# Altium PCB SNES TST Adapter.PcbDoc
Units mm, origin at the board's own origin, x right, y up, seen from the top; angles counter-clockwise.
Board outline 18.8 x 25 mm, 4 copper layers (Top Layer, Signal Layer 1, Signal Layer 2, Bottom Layer), stack 0.778 mm thick; 2 components, 68 nets, 280 pads, 86 vias.
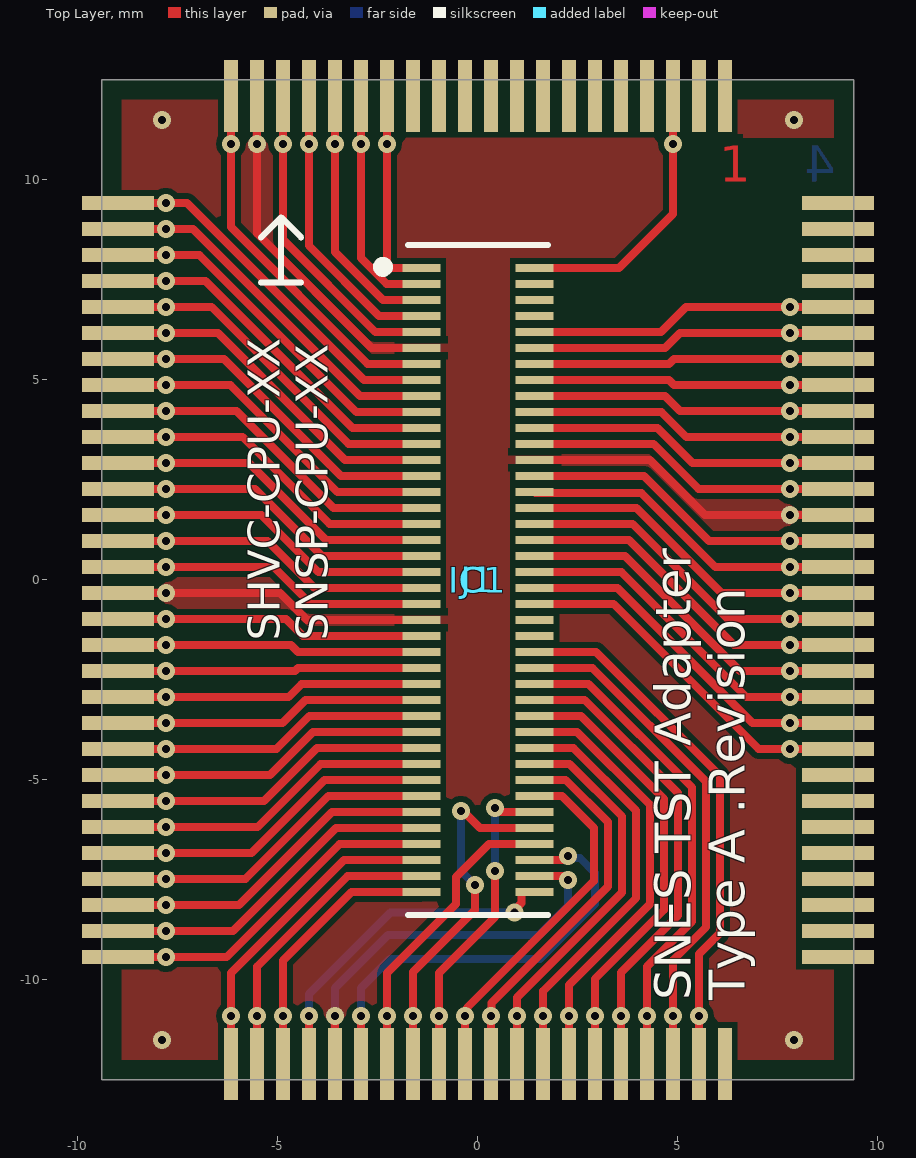
[diagram p0: Top Layer view]
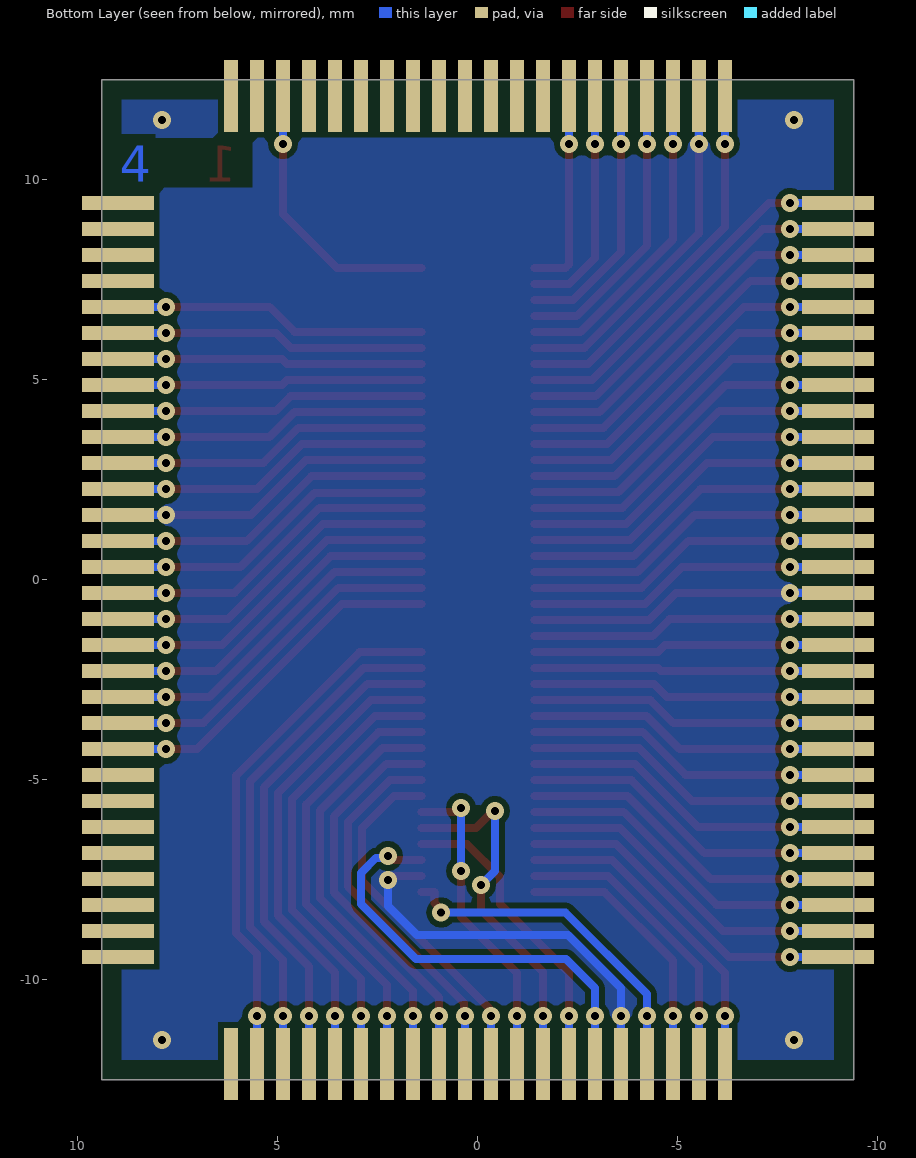
[diagram p1: Bottom Layer view, seen from below]
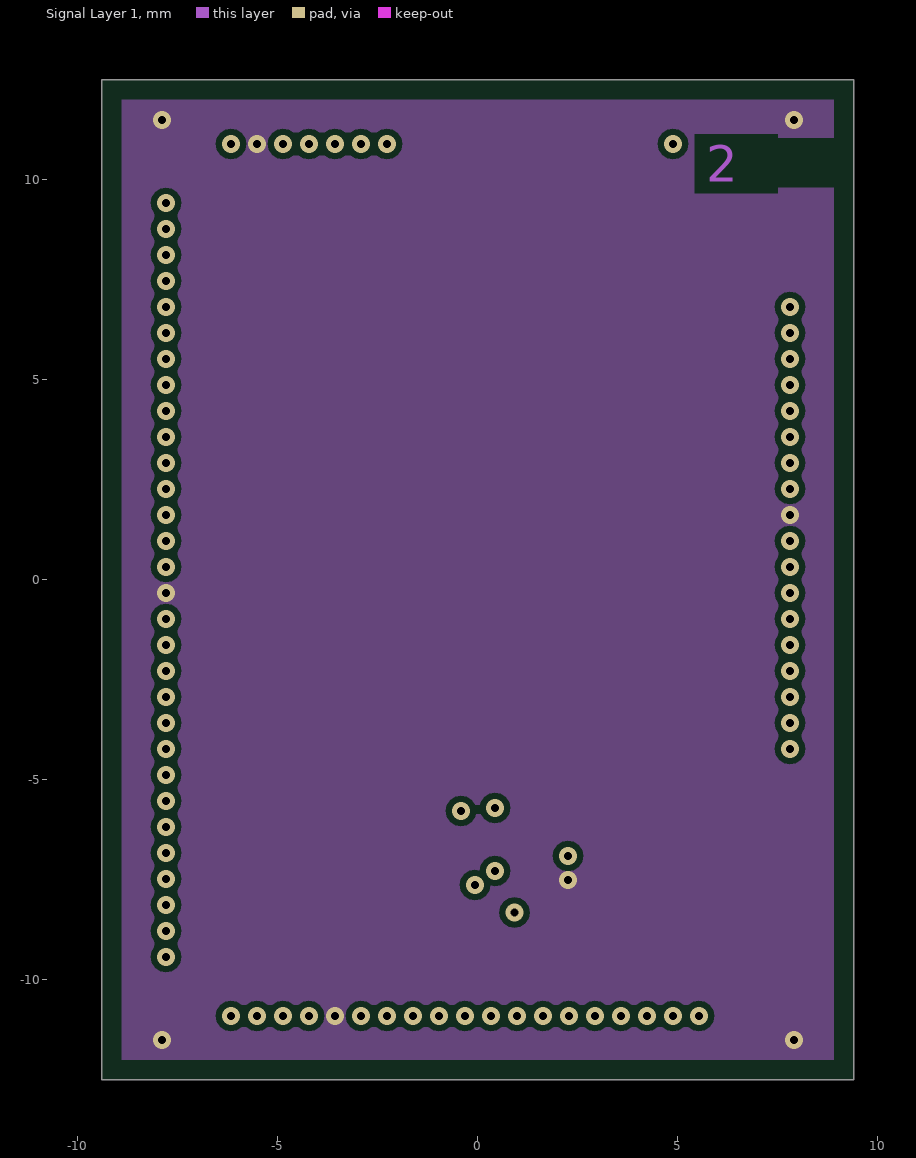
[diagram p2: Signal Layer 1]
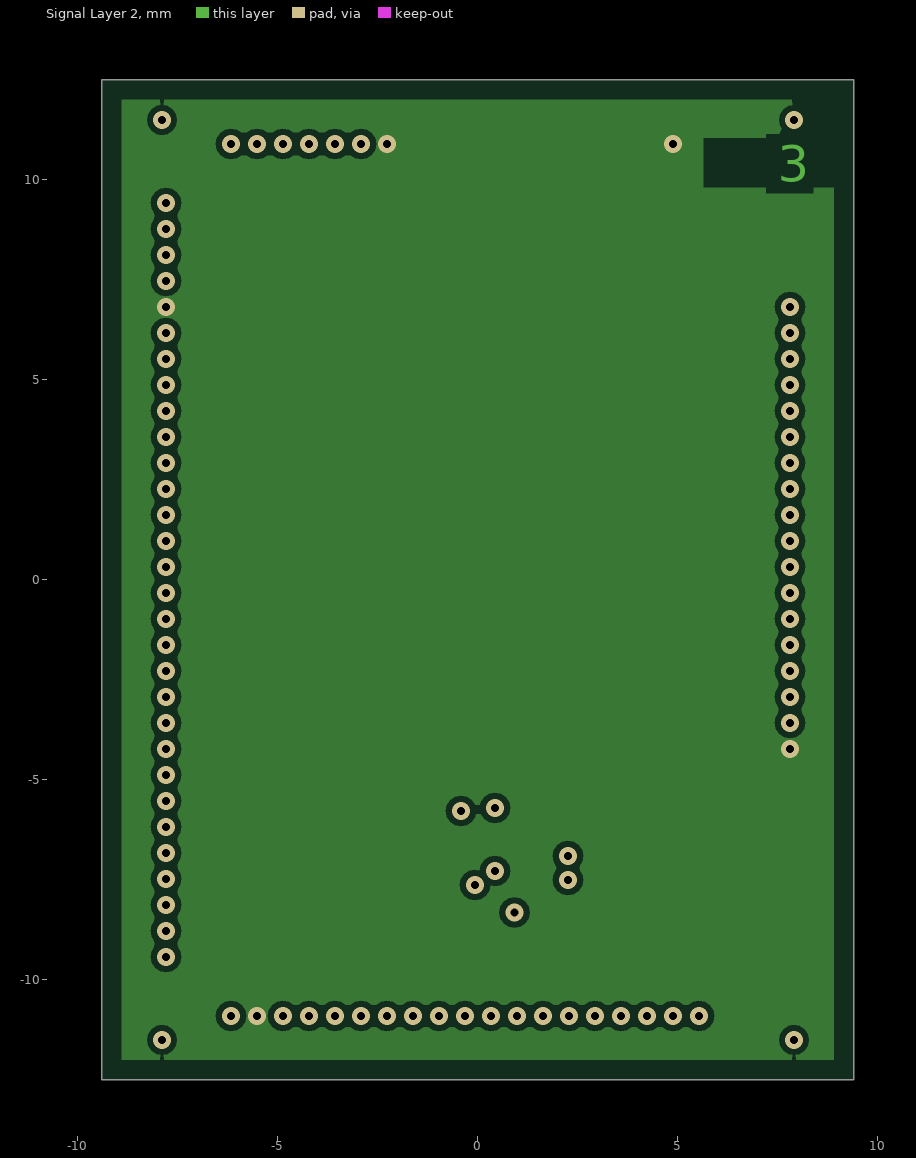
[diagram p3: Signal Layer 2]

## Layer stack, top to bottom
Top Solder: solder mask 0.0102, Solder Resist, Dk 3.5
Top Layer: signal copper 0.0356
Dielectric 1: core 0.254, FR-4, Dk 4.2
Signal Layer 1: signal copper 0.036
Dielectric 3: prepreg 0.127, Dk 4.2
Signal Layer 2: signal copper 0.036
Dielectric 2: core 0.254, Dk 4.2
Bottom Layer: signal copper 0.0356
Bottom Solder: solder mask 0.0102, Solder Resist, Dk 3.5

## Board outline
-9.4,-12.5 9.4,-12.5 9.4,12.5 -9.4,12.5

## Design rules (kind name [scope] priority, off if disabled: settings)
Clearance Clearance_1 [OnLayer('Keep-Out Layer')] p1: gap=0.15 ignorepadtopadclearanceinfootprint=FALSE except(0: Arc-Hole Track-Hole SMDPad-Hole THPad-Hole Via-Hole Fill-Hole Poly-Hole Region-Hole Text-Hole)
Clearance [All] p2: gap=0.15 ignorepadtopadclearanceinfootprint=FALSE except(0: Arc-Hole Track-Hole SMDPad-Hole THPad-Hole Via-Hole Fill-Hole Poly-Hole Region-Hole Text-Hole)
MinimumSolderMaskSliver [All] p1: minsoldermaskwidth=0.099
PolygonConnect PolygonConnect_Via [isVia] p1: connectstyle=Direct reliefconductorwidth=0.254 reliefentries=4 polygonreliefangle="90 Angle" airgapwidth=0.254
PolygonConnect [All] p2: connectstyle=Relief reliefconductorwidth=0.2 reliefentries=4 polygonreliefangle="90 Angle" airgapwidth=0.2
RoutingVias [All] p1: holewidth=0.711 width=1.27 viastyle="Through Hole" minholewidth=0.2 minwidth=0.35 maxholewidth=0.711 maxwidth=1.27
SilkToSilkClearance [All] p1: silktosilkclearance=0.1
SilkToSolderMaskClearance [IsPad] p1: minsilkscreentomaskgap=0.1 clearancetoexposedcopper=TRUE
SolderMaskExpansion [All] p1: expansion=0.05 istentingtop=FALSE
UnRoutedNet [Not InNet('5V_S')] p1:
Width [All] p1: maxlimit=0.75 minlimit=0.2 preferedwidth=0.254
26 further rules are at their usual default settings.

## Components (designator, comment, footprint, x,y, rotation, side; value= is the part's Value field where it differs from the comment)
IC1 "PPU2100Pin" PPU100Pin_Double 0,0 r0 top
J1 "Conn 80P" DF40C-80DS 0,0 r270 top

## Footprints (in the part's own frame and the unit in brackets; to place one, negate y for a bottom-side part, rotate by r counter-clockwise, add the part's x,y. Pads: shape width x height; smd on the part's side, far side on the other; paste and mask are expansions set on the pad)
DF40C-80DS [mm]
  rect 0.2x0.95 smd: 1(-7.8,-1.415) 2(-7.8,1.415) 3(-7.4,-1.415) 4(-7.4,1.415) 5(-7,-1.415) 6(-7,1.415) 7(-6.6,-1.415) 8(-6.6,1.415) 9(-6.2,-1.415) 10(-6.2,1.415) 11(-5.8,-1.415) 12(-5.8,1.415) 13(-5.4,-1.415) 14(-5.4,1.415) 15(-5,-1.415) 16(-5,1.415) 17(-4.6,-1.415) 18(-4.6,1.415) 19(-4.2,-1.415) 20(-4.2,1.415) 21(-3.8,-1.415) 22(-3.8,1.415) 23(-3.4,-1.415) 24(-3.4,1.415) 25(-3,-1.415) 26(-3,1.415) 27(-2.6,-1.415) 28(-2.6,1.415) 29(-2.2,-1.415) 30(-2.2,1.415) 31(-1.8,-1.415) 32(-1.8,1.415) 33(-1.4,-1.415) 34(-1.4,1.415) 35(-1,-1.415) 36(-1,1.415) 37(-0.6,-1.415) 38(-0.6,1.415) 39(-0.2,-1.415) 40(-0.2,1.415) 41(0.2,-1.415) 42(0.2,1.415) 43(0.6,-1.415) 44(0.6,1.415) 45(1,-1.415) 46(1,1.415) 47(1.4,-1.415) 48(1.4,1.415) 49(1.8,-1.415) 50(1.8,1.415) 51(2.2,-1.415) 52(2.2,1.415) 53(2.6,-1.415) 54(2.6,1.415) 55(3,-1.415) 56(3,1.415) 57(3.4,-1.415) 58(3.4,1.415) 59(3.8,-1.415) 60(3.8,1.415) 61(4.2,-1.415) 62(4.2,1.415) 63(4.6,-1.415) 64(4.6,1.415) 65(5,-1.415) 66(5,1.415) 67(5.4,-1.415) 68(5.4,1.415) 69(5.8,-1.415) 70(5.8,1.415) 71(6.2,-1.415) 72(6.2,1.415) 73(6.6,-1.415) 74(6.6,1.415) 75(7,-1.415) 76(7,1.415) 77(7.4,-1.415) 78(7.4,1.415) 79(7.8,-1.415) 80(7.8,1.415)
  silkscreen extent -8.37,-2.5 8.37,1.75, body extent -9.3,-1.69 9.3,1.69, height 1.4
PPU100Pin_Double [mm]
  rect 1.8x0.35 smd: 1(-9,9.425) 2(-9,8.775) 3(-9,8.125) 4(-9,7.475) 5(-9,6.825) 6(-9,6.175) 7(-9,5.525) 8(-9,4.875) 9(-9,4.225) 10(-9,3.575) 11(-9,2.925) 12(-9,2.275) 13(-9,1.625) 14(-9,0.975) 15(-9,0.325) 16(-9,-0.325) 17(-9,-0.975) 18(-9,-1.625) 19(-9,-2.275) 20(-9,-2.925) 21(-9,-3.575) 22(-9,-4.225) 23(-9,-4.875) 24(-9,-5.525) 25(-9,-6.175) 26(-9,-6.825) 27(-9,-7.475) 28(-9,-8.125) 29(-9,-8.775) 30(-9,-9.425) 51(9,-9.425) 52(9,-8.775) 53(9,-8.125) 54(9,-7.475) 55(9,-6.825) 56(9,-6.175) 57(9,-5.525) 58(9,-4.875) 59(9,-4.225) 60(9,-3.575) 61(9,-2.925) 62(9,-2.275) 63(9,-1.625) 64(9,-0.975) 65(9,-0.325) 66(9,0.325) 67(9,0.975) 68(9,1.625) 69(9,2.275) 70(9,2.925) 71(9,3.575) 72(9,4.225) 73(9,4.875) 74(9,5.525) 75(9,6.175) 76(9,6.825) 77(9,7.475) 78(9,8.125) 79(9,8.775) 80(9,9.425)
  rect 1.8x0.35 smd far side: 1(-9,9.425) 2(-9,8.775) 3(-9,8.125) 4(-9,7.475) 5(-9,6.825) 6(-9,6.175) 7(-9,5.525) 8(-9,4.875) 9(-9,4.225) 10(-9,3.575) 11(-9,2.925) 12(-9,2.275) 13(-9,1.625) 14(-9,0.975) 15(-9,0.325) 16(-9,-0.325) 17(-9,-0.975) 18(-9,-1.625) 19(-9,-2.275) 20(-9,-2.925) 21(-9,-3.575) 22(-9,-4.225) 23(-9,-4.875) 24(-9,-5.525) 25(-9,-6.175) 26(-9,-6.825) 27(-9,-7.475) 28(-9,-8.125) 29(-9,-8.775) 30(-9,-9.425) 51(9,-9.425) 52(9,-8.775) 53(9,-8.125) 54(9,-7.475) 55(9,-6.825) 56(9,-6.175) 57(9,-5.525) 58(9,-4.875) 59(9,-4.225) 60(9,-3.575) 61(9,-2.925) 62(9,-2.275) 63(9,-1.625) 64(9,-0.975) 65(9,-0.325) 66(9,0.325) 67(9,0.975) 68(9,1.625) 69(9,2.275) 70(9,2.925) 71(9,3.575) 72(9,4.225) 73(9,4.875) 74(9,5.525) 75(9,6.175) 76(9,6.825) 77(9,7.475) 78(9,8.125) 79(9,8.775) 80(9,9.425)
  rect 0.35x1.8 smd: 31(-6.175,-12.1) 32(-5.525,-12.1) 33(-4.875,-12.1) 34(-4.225,-12.1) 35(-3.575,-12.1) 36(-2.925,-12.1) 37(-2.275,-12.1) 38(-1.625,-12.1) 39(-0.975,-12.1) 40(-0.325,-12.1) 41(0.325,-12.1) 42(0.975,-12.1) 43(1.625,-12.1) 44(2.275,-12.1) 45(2.925,-12.1) 46(3.575,-12.1) 47(4.225,-12.1) 48(4.875,-12.1) 49(5.525,-12.1) 50(6.175,-12.1) 81(6.175,12.1) 82(5.525,12.1) 83(4.875,12.1) 84(4.225,12.1) 85(3.575,12.1) 86(2.925,12.1) 87(2.275,12.1) 88(1.625,12.1) 89(0.975,12.1) 90(0.325,12.1) 91(-0.325,12.1) 92(-0.975,12.1) 93(-1.625,12.1) 94(-2.275,12.1) 95(-2.925,12.1) 96(-3.575,12.1) 97(-4.225,12.1) 98(-4.875,12.1) 99(-5.525,12.1) 100(-6.175,12.1)
  rect 0.35x1.8 smd far side: 31(-6.175,-12.1) 32(-5.525,-12.1) 33(-4.875,-12.1) 34(-4.225,-12.1) 35(-3.575,-12.1) 36(-2.925,-12.1) 37(-2.275,-12.1) 38(-1.625,-12.1) 39(-0.975,-12.1) 40(-0.325,-12.1) 41(0.325,-12.1) 42(0.975,-12.1) 43(1.625,-12.1) 44(2.275,-12.1) 45(2.925,-12.1) 46(3.575,-12.1) 47(4.225,-12.1) 48(4.875,-12.1) 49(5.525,-12.1) 50(6.175,-12.1) 81(6.175,12.1) 82(5.525,12.1) 83(4.875,12.1) 84(4.225,12.1) 85(3.575,12.1) 86(2.925,12.1) 87(2.275,12.1) 88(1.625,12.1) 89(0.975,12.1) 90(0.325,12.1) 91(-0.325,12.1) 92(-0.975,12.1) 93(-1.625,12.1) 94(-2.275,12.1) 95(-2.925,12.1) 96(-3.575,12.1) 97(-4.225,12.1) 98(-4.875,12.1) 99(-5.525,12.1) 100(-6.175,12.1)

## Part data
IC1: "PPU2"
J1: "80Pole Connector", System=Connector

## Via types
v1: diameter 0.45, hole 0.2, Top Layer to Bottom Layer, tented both sides, 86 vias

## Nets (pads, with @x,y where several pads share a name; then routed paths per layer and width w, separated by ;. In a path a pad name is that pad's centre, name@x,y a point inside that pad or via, vN(x,y) a via of type N, cw(c..) or ccw(c..) an arc to the next point about the centre after c; other vN are vias at no path point)
3.58M: IC1.3 J1.19 | length 10.4
  Top Layer w0.2: IC1.3@-9,8.125 v1(-7.8,8.125) -6.965,8.125 -3.04,4.2 J1.19
  Bottom Layer w0.2: IC1.3@-9,8.125 v1(-7.8,8.125)
5MIN: IC1.38 J1.72 | length 10.3
  Top Layer w0.2: IC1.38@-1.625,-12.1 v1(-1.625,-10.9) -1.625,-9.803 -0.075,-8.253 v1(-0.075,-7.625) ; v1(-0.425,-5.775) -0.375,-5.775 0.05,-6.2 J1.72
  Bottom Layer w0.2: IC1.38@-1.625,-12.1 v1(-1.625,-10.9) ; v1(-0.425,-5.775) -0.425,-7.275 v1(-0.075,-7.625)
5MOUT: IC1.27 J1.67 | length 9.6
  Top Layer w0.2: IC1.27@-9,-7.475 v1(-7.8,-7.475) -5.815,-7.475 -3.74,-5.4 J1.67
  Bottom Layer w0.2: IC1.27@-9,-7.475 v1(-7.8,-7.475)
5V: IC1.5 IC1.32 IC1.59 IC1.83 IC1.94 J1.1 J1.2 J1.23 J1.44 J1.77 | length 43.6
  Top Layer w0.2: IC1.5@-9,6.825 v1(-7.8,6.825) -6.655,6.825 -3.23,3.4 J1.23 ; IC1.32@-5.525,-12.1 v1(-5.525,-10.9) -5.525,-9.67 -3.255,-7.4 J1.77 ; IC1.94@-2.275,12.1 v1(-2.275,10.9) -2.275,7.89 -2.185,7.8 J1.1 ; J1.44 3.395,-0.6 7.02,-4.225 v1(7.8,-4.225) IC1.59@9,-4.225 ; J1.2 3.525,7.8 4.875,9.15 v1(4.875,10.9) IC1.83@4.875,12.1
  Bottom Layer w0.2: IC1.5@-9,6.825 v1(-7.8,6.825) ; IC1.32@-5.525,-12.1 v1(-5.525,-10.9) ; v1(-2.275,10.9) IC1.94@-2.275,12.1 ; v1(4.875,10.9) IC1.83@4.875,12.1 ; v1(7.8,-4.225) IC1.59@9,-4.225
B: IC1.97 J1.7 | length 8.5
  Top Layer w0.2: IC1.97@-4.225,12.1 v1(-4.225,10.9) -4.225,8.355 -2.47,6.6 J1.7
  Bottom Layer w0.2: v1(-4.225,10.9) IC1.97@-4.225,12.1
BURST: IC1.1 J1.15 | length 10.6
  Top Layer w0.2: IC1.1@-9,9.425 v1(-7.8,9.425) -7.275,9.425 -2.85,5 J1.15
  Bottom Layer w0.2: IC1.1@-9,9.425 v1(-7.8,9.425)
CHR0: IC1.46 J1.56 | length 13.1
  Top Layer w0.2: J1.56 2.67,-3 5,-5.33 5,-8.392 3.575,-9.817 v1(3.575,-10.9) IC1.46@3.575,-12.1
  Bottom Layer w0.2: IC1.46@3.575,-12.1 v1(3.575,-10.9)
CHR1: IC1.47 J1.54 | length 13.6
  Top Layer w0.2: J1.54 2.765,-2.6 5.35,-5.185 5.35,-8.537 4.225,-9.662 v1(4.225,-10.9) IC1.47@4.225,-12.1
  Bottom Layer w0.2: IC1.47@4.225,-12.1 v1(4.225,-10.9)
CHR2: IC1.48 J1.52 | length 14.1
  Top Layer w0.2: J1.52 2.86,-2.2 5.7,-5.04 5.7,-8.682 4.875,-9.507 v1(4.875,-10.9) IC1.48@4.875,-12.1
  Bottom Layer w0.2: IC1.48@4.875,-12.1 v1(4.875,-10.9)
CHR3: IC1.49 J1.50 | length 14.5
  Top Layer w0.2: J1.50 2.955,-1.8 6.05,-4.895 6.05,-8.827 5.525,-9.351 v1(5.525,-10.9) IC1.49@5.525,-12.1
  Bottom Layer w0.2: IC1.49@5.525,-12.1 v1(5.525,-10.9)
COLOR0: IC1.41 J1.66 | length 10.7
  Top Layer w0.2: IC1.41@0.325,-12.1 v1(0.325,-10.9) 0.342,-10.883 0.342,-10.575 3.25,-7.667 3.25,-6.055 2.195,-5 J1.66
  Bottom Layer w0.2: IC1.41@0.325,-12.1 v1(0.325,-10.9)
COLOR1: IC1.42 J1.64 | length 11.2
  Top Layer w0.2: IC1.42@0.975,-12.1 v1(0.975,-10.9) 0.975,-10.437 3.6,-7.812 3.6,-5.91 2.29,-4.6 J1.64
  Bottom Layer w0.2: IC1.42@0.975,-12.1 v1(0.975,-10.9)
COLOR2: IC1.43 J1.62 | length 11.7
  Top Layer w0.2: J1.62 2.385,-4.2 3.95,-5.765 3.95,-7.957 1.625,-10.282 v1(1.625,-10.9) IC1.43@1.625,-12.1
  Bottom Layer w0.2: IC1.43@1.625,-12.1 v1(1.625,-10.9)
CSYNC: IC1.100 J1.13 | length 10.7
  Top Layer w0.2: IC1.100@-6.175,12.1 v1(-6.175,10.9) -6.175,8.82 -2.755,5.4 J1.13
  Bottom Layer w0.2: v1(-6.175,10.9) IC1.100@-6.175,12.1
D0: IC1.15 J1.43 | length 9.2
  Top Layer w0.2: IC1.15@-9,0.325 v1(-7.8,0.325) -5.104,0.325 -4.179,-0.6 J1.43
  Bottom Layer w0.2: IC1.15@-9,0.325 v1(-7.8,0.325)
D1: IC1.14 J1.41 | length 9.3
  Top Layer w0.2: IC1.14@-9,0.975 v1(-7.8,0.975) -5.259,0.975 -4.085,-0.2 J1.41
  Bottom Layer w0.2: IC1.14@-9,0.975 v1(-7.8,0.975)
D2: IC1.13 J1.39 | length 9.4
  Top Layer w0.2: IC1.13@-9,1.625 v1(-7.8,1.625) -5.415,1.625 -3.99,0.2 J1.39
  Bottom Layer w0.2: IC1.13@-9,1.625 v1(-7.8,1.625)
D3: IC1.12 J1.37 | length 9.5
  Top Layer w0.2: IC1.12@-9,2.275 v1(-7.8,2.275) -5.57,2.275 -3.895,0.6 J1.37
  Bottom Layer w0.2: IC1.12@-9,2.275 v1(-7.8,2.275)
D4: IC1.11 J1.35 | length 9.6
  Top Layer w0.2: IC1.11@-9,2.925 v1(-7.8,2.925) -5.725,2.925 -3.8,1 J1.35
  Bottom Layer w0.2: IC1.11@-9,2.925 v1(-7.8,2.925)
D5: IC1.10 J1.33 | length 9.7
  Top Layer w0.2: IC1.10@-9,3.575 v1(-7.8,3.575) -5.88,3.575 -3.705,1.4 J1.33
  Bottom Layer w0.2: IC1.10@-9,3.575 v1(-7.8,3.575)
D6: IC1.9 J1.31 | length 9.8
  Top Layer w0.2: IC1.9@-9,4.225 v1(-7.8,4.225) -6.035,4.225 -3.61,1.8 J1.31
  Bottom Layer w0.2: IC1.9@-9,4.225 v1(-7.8,4.225)
D7: IC1.8 J1.29 | length 9.9
  Top Layer w0.2: IC1.8@-9,4.875 v1(-7.8,4.875) -6.19,4.875 -3.515,2.2 J1.29
  Bottom Layer w0.2: IC1.8@-9,4.875 v1(-7.8,4.875)
EXTLATCH: IC1.29 J1.71 | length 9.9
  Top Layer w0.2: IC1.29@-9,-8.775 v1(-7.8,-8.775) -6.125,-8.775 -3.55,-6.2 J1.71
  Bottom Layer w0.2: IC1.29@-9,-8.775 v1(-7.8,-8.775)
FIELD: IC1.36 J1.76 | length 12.3
  Top Layer w0.2: IC1.36@-2.925,-12.1 v1(-2.925,-10.9) ; J1.76 2.15,-7 v1(2.25,-6.9)
  Bottom Layer w0.2: IC1.36@-2.925,-12.1 -2.925,-10.2 -2.2,-9.475 1.55,-9.475 2.925,-8.1 2.925,-7.325 2.546,-6.946 2.296,-6.946 v1(2.25,-6.9)
G: IC1.96 J1.5 | length 7.8
  Top Layer w0.2: IC1.96@-3.575,12.1 v1(-3.575,10.9) -3.575,8.2 -2.375,7 J1.5
  Bottom Layer w0.2: v1(-3.575,10.9) IC1.96@-3.575,12.1
GND: IC1.16 IC1.35 IC1.68 IC1.99 J1.11 J1.26 J1.45 J1.78 | length 39.7
  Top Layer w0.2: IC1.16@-9,-0.325 v1(-7.8,-0.325) -4.949,-0.325 -4.274,-1 J1.45 ; IC1.99@-5.525,12.1 v1(-5.525,10.9) -5.525,8.665 -2.66,5.8 J1.11 ; IC1.35@-3.575,-12.1 v1(-3.575,-10.9) ; J1.78 2.15,-7.4 v1(2.25,-7.5) ; J1.26 4.3,3 5.675,1.625 v1(7.8,1.625) IC1.68@9,1.625
  Bottom Layer w0.2: IC1.16@-9,-0.325 v1(-7.8,-0.325) ; v1(-5.525,10.9) IC1.99@-5.525,12.1 ; IC1.35@-3.575,-12.1 -3.575,-10.2 -2.25,-8.875 1.525,-8.875 2.25,-8.15 v1(2.25,-7.5) ; v1(7.8,1.625) IC1.68@9,1.625
  other v1: -7.9,-11.5 7.9,-11.5 -7.9,11.5 7.9,11.5
HBLANK: IC1.25 J1.63 | length 9.4
  Top Layer w0.2: IC1.25@-9,-6.175 v1(-7.8,-6.175) -5.505,-6.175 -3.93,-4.6 J1.63
  Bottom Layer w0.2: IC1.25@-9,-6.175 v1(-7.8,-6.175)
HCLD: IC1.39 J1.70 | length 9.2
  Top Layer w0.2: IC1.39@-0.975,-12.1 v1(-0.975,-10.9) -0.975,-9.825 0.425,-8.425 v1(0.425,-7.275) ; v1(0.425,-5.7) 0.525,-5.8 J1.70
  Bottom Layer w0.2: IC1.39@-0.975,-12.1 v1(-0.975,-10.9) ; v1(0.425,-7.275) v1(0.425,-5.7)
HVC: IC1.98 J1.9 | length 9.2
  Top Layer w0.2: IC1.98@-4.875,12.1 v1(-4.875,10.9) -4.875,8.51 -2.565,6.2 J1.9
  Bottom Layer w0.2: v1(-4.875,10.9) IC1.98@-4.875,12.1
OVER1: IC1.37 J1.74 | length 8.9
  Top Layer w0.2: IC1.37@-2.275,-12.1 v1(-2.275,-10.9) -2.275,-9.825 -0.55,-8.1 -0.55,-7.428 0.278,-6.6 J1.74
  Bottom Layer w0.2: IC1.37@-2.275,-12.1 v1(-2.275,-10.9)
PA0: IC1.24 J1.61 | length 9.3
  Top Layer w0.2: IC1.24@-9,-5.525 v1(-7.8,-5.525) -5.35,-5.525 -4.025,-4.2 J1.61
  Bottom Layer w0.2: IC1.24@-9,-5.525 v1(-7.8,-5.525)
PA1: IC1.23 J1.59 | length 9.2
  Top Layer w0.2: IC1.23@-9,-4.875 v1(-7.8,-4.875) -5.195,-4.875 -4.12,-3.8 J1.59
  Bottom Layer w0.2: IC1.23@-9,-4.875 v1(-7.8,-4.875)
PA2: IC1.22 J1.57 | length 9.1
  Top Layer w0.2: IC1.22@-9,-4.225 v1(-7.8,-4.225) -5.04,-4.225 -4.215,-3.4 J1.57
  Bottom Layer w0.2: IC1.22@-9,-4.225 v1(-7.8,-4.225)
PA3: IC1.21 J1.55 | length 9
  Top Layer w0.2: IC1.21@-9,-3.575 v1(-7.8,-3.575) -4.885,-3.575 -4.31,-3 J1.55
  Bottom Layer w0.2: IC1.21@-9,-3.575 v1(-7.8,-3.575)
PA4: IC1.20 J1.53 | length 8.9
  Top Layer w0.2: IC1.20@-9,-2.925 v1(-7.8,-2.925) -4.73,-2.925 -4.405,-2.6 J1.53
  Bottom Layer w0.2: IC1.20@-9,-2.925 v1(-7.8,-2.925)
PA5: IC1.19 J1.51 | length 8.8
  Top Layer w0.2: IC1.19@-9,-2.275 v1(-7.8,-2.275) -4.575,-2.275 -4.5,-2.2 J1.51
  Bottom Layer w0.2: IC1.19@-9,-2.275 v1(-7.8,-2.275)
PA6: IC1.18 J1.49 | length 8.9
  Top Layer w0.2: IC1.18@-9,-1.625 v1(-7.8,-1.625) -4.675,-1.625 -4.5,-1.8 J1.49
  Bottom Layer w0.2: IC1.18@-9,-1.625 v1(-7.8,-1.625)
PA7: IC1.17 J1.47 | length 9
  Top Layer w0.2: IC1.17@-9,-0.975 v1(-7.8,-0.975) -4.794,-0.975 -4.369,-1.4 J1.47
  Bottom Layer w0.2: IC1.17@-9,-0.975 v1(-7.8,-0.975)
PALMODE: IC1.30 J1.73 | length 10
  Top Layer w0.2: IC1.30@-9,-9.425 v1(-7.8,-9.425) -6.28,-9.425 -3.455,-6.6 J1.73
  Bottom Layer w0.2: IC1.30@-9,-9.425 v1(-7.8,-9.425)
PARD: IC1.7 J1.27 | length 10
  Top Layer w0.2: IC1.7@-9,5.525 v1(-7.8,5.525) -6.345,5.525 -3.42,2.6 J1.27
  Bottom Layer w0.2: IC1.7@-9,5.525 v1(-7.8,5.525)
PAWR: IC1.6 J1.25 | length 10.1
  Top Layer w0.2: IC1.6@-9,6.175 v1(-7.8,6.175) -6.5,6.175 -3.325,3 J1.25
  Bottom Layer w0.2: IC1.6@-9,6.175 v1(-7.8,6.175)
PED: IC1.2 J1.17 | length 10.5
  Top Layer w0.2: IC1.2@-9,8.775 v1(-7.8,8.775) -7.12,8.775 -2.945,4.6 J1.17
  Bottom Layer w0.2: IC1.2@-9,8.775 v1(-7.8,8.775)
PRIO0: IC1.44 J1.60 | length 12.2
  Top Layer w0.2: J1.60 2.48,-3.8 4.3,-5.62 4.3,-8.102 2.275,-10.127 v1(2.275,-10.9) IC1.44@2.275,-12.1
  Bottom Layer w0.2: IC1.44@2.275,-12.1 v1(2.275,-10.9)
PRIO1: IC1.45 J1.58 | length 12.6
  Top Layer w0.2: J1.58 2.575,-3.4 4.65,-5.475 4.65,-8.247 2.925,-9.972 v1(2.925,-10.9) IC1.45@2.925,-12.1
  Bottom Layer w0.2: IC1.45@2.925,-12.1 v1(2.925,-10.9)
R: IC1.95 J1.3 | length 7
  Top Layer w0.2: IC1.95@-2.925,12.1 v1(-2.925,10.9) -2.925,8.045 -2.28,7.4 J1.3
  Bottom Layer w0.2: v1(-2.925,10.9) IC1.95@-2.925,12.1
RESET: IC1.34 J1.80 | length 9.8
  Top Layer w0.2: IC1.34@-4.225,-12.1 v1(-4.225,-10.9) ; v1(0.917,-8.315) 0.917,-8.247 1.088,-8.076 1.088,-7.8 J1.80
  Bottom Layer w0.2: IC1.34@-4.225,-12.1 v1(-4.225,-10.9) -4.225,-10.355 -2.185,-8.315 v1(0.917,-8.315)
RESOUT0: IC1.33 J1.79 | length 8
  Top Layer w0.2: IC1.33@-4.875,-12.1 v1(-4.875,-10.9) -4.875,-9.515 -3.16,-7.8 J1.79
  Bottom Layer w0.2: IC1.33@-4.875,-12.1 v1(-4.875,-10.9)
RESOUT1: IC1.28 J1.69 | length 9.7
  Top Layer w0.2: IC1.28@-9,-8.125 v1(-7.8,-8.125) -5.97,-8.125 -3.645,-5.8 J1.69
  Bottom Layer w0.2: IC1.28@-9,-8.125 v1(-7.8,-8.125)
TOUMEI: IC1.4 J1.21 | length 10.3
  Top Layer w0.2: IC1.4@-9,7.475 v1(-7.8,7.475) -6.81,7.475 -3.135,3.8 J1.21
  Bottom Layer w0.2: IC1.4@-9,7.475 v1(-7.8,7.475)
VBLANK: IC1.26 J1.65 | length 9.5
  Top Layer w0.2: IC1.26@-9,-6.825 v1(-7.8,-6.825) -5.66,-6.825 -3.835,-5 J1.65
  Bottom Layer w0.2: IC1.26@-9,-6.825 v1(-7.8,-6.825)
VCLD: IC1.40 J1.68 | length 10.3
  Top Layer w0.2: IC1.40@-0.325,-12.1 v1(-0.325,-10.9) -0.277,-10.852 -0.277,-10.699 1.339,-9.083 2.9,-7.522 2.9,-6.2 2.1,-5.4 J1.68
  Bottom Layer w0.2: IC1.40@-0.325,-12.1 v1(-0.325,-10.9)
VDA0: IC1.60 J1.42 | length 10.2
  Top Layer w0.2: J1.42 3.49,-0.2 6.865,-3.575 v1(7.8,-3.575) IC1.60@9,-3.575
  Bottom Layer w0.2: v1(7.8,-3.575) IC1.60@9,-3.575
VDA1: IC1.61 J1.40 | length 10.1
  Top Layer w0.2: J1.40 3.585,0.2 6.71,-2.925 v1(7.8,-2.925) IC1.61@9,-2.925
  Bottom Layer w0.2: v1(7.8,-2.925) IC1.61@9,-2.925
VDA2: IC1.62 J1.38 | length 10
  Top Layer w0.2: J1.38 3.68,0.6 6.555,-2.275 v1(7.8,-2.275) IC1.62@9,-2.275
  Bottom Layer w0.2: v1(7.8,-2.275) IC1.62@9,-2.275
VDA3: IC1.63 J1.36 | length 9.9
  Top Layer w0.2: J1.36 3.775,1 6.4,-1.625 v1(7.8,-1.625) IC1.63@9,-1.625
  Bottom Layer w0.2: v1(7.8,-1.625) IC1.63@9,-1.625
VDA4: IC1.64 J1.34 | length 9.8
  Top Layer w0.2: J1.34 3.87,1.4 6.245,-0.975 v1(7.8,-0.975) IC1.64@9,-0.975
  Bottom Layer w0.2: v1(7.8,-0.975) IC1.64@9,-0.975
VDA5: IC1.65 J1.32 | length 9.7
  Top Layer w0.2: J1.32 3.965,1.8 6.09,-0.325 v1(7.8,-0.325) IC1.65@9,-0.325
  Bottom Layer w0.2: v1(7.8,-0.325) IC1.65@9,-0.325
VDA6: IC1.66 J1.30 | length 9.6
  Top Layer w0.2: J1.30 1.44,2.175 4.085,2.175 5.935,0.325 v1(7.8,0.325) IC1.66@9,0.325
  Bottom Layer w0.2: v1(7.8,0.325) IC1.66@9,0.325
VDA7: IC1.67 J1.28 | length 9.5
  Top Layer w0.2: J1.28 4.155,2.6 5.78,0.975 v1(7.8,0.975) IC1.67@9,0.975
  Bottom Layer w0.2: v1(7.8,0.975) IC1.67@9,0.975
VDB0: IC1.69 J1.24 | length 9.3
  Top Layer w0.2: J1.24 4.395,3.4 5.52,2.275 v1(7.8,2.275) IC1.69@9,2.275
  Bottom Layer w0.2: v1(7.8,2.275) IC1.69@9,2.275
VDB1: IC1.70 J1.22 | length 9.1
  Top Layer w0.2: J1.22 4.49,3.8 5.365,2.925 v1(7.8,2.925) IC1.70@9,2.925
  Bottom Layer w0.2: v1(7.8,2.925) IC1.70@9,2.925
VDB2: IC1.71 J1.20 | length 9
  Top Layer w0.2: J1.20 4.585,4.2 5.21,3.575 v1(7.8,3.575) IC1.71@9,3.575
  Bottom Layer w0.2: v1(7.8,3.575) IC1.71@9,3.575
VDB3: IC1.72 J1.18 | length 8.9
  Top Layer w0.2: J1.18 4.68,4.6 5.055,4.225 v1(7.8,4.225) IC1.72@9,4.225
  Bottom Layer w0.2: v1(7.8,4.225) IC1.72@9,4.225
VDB4: IC1.73 J1.16 | length 8.8
  Top Layer w0.2: J1.16 4.775,5 4.9,4.875 v1(7.8,4.875) IC1.73@9,4.875
  Bottom Layer w0.2: v1(7.8,4.875) IC1.73@9,4.875
VDB5: IC1.74 J1.14 | length 8.8
  Top Layer w0.2: J1.14 4.775,5.4 4.9,5.525 v1(7.8,5.525) IC1.74@9,5.525
  Bottom Layer w0.2: v1(7.8,5.525) IC1.74@9,5.525
VDB6: IC1.75 J1.12 | length 8.9
  Top Layer w0.2: J1.12 4.675,5.8 5.05,6.175 v1(7.8,6.175) IC1.75@9,6.175
  Bottom Layer w0.2: v1(7.8,6.175) IC1.75@9,6.175
VDB7: IC1.76 J1.10 | length 9
  Top Layer w0.2: J1.10 4.58,6.2 5.205,6.825 v1(7.8,6.825) IC1.76@9,6.825
  Bottom Layer w0.2: v1(7.8,6.825) IC1.76@9,6.825
XIN: IC1.31 J1.75 | length 9.4
  Top Layer w0.2: IC1.31@-6.175,-12.1 v1(-6.175,-10.9) -6.175,-9.825 -3.35,-7 J1.75
  Bottom Layer w0.2: IC1.31@-6.175,-12.1 v1(-6.175,-10.9)
pads on no net: IC1.50 IC1.51 IC1.52 IC1.53 IC1.54 IC1.55 IC1.56 IC1.57 IC1.58 IC1.77 IC1.78 IC1.79 IC1.80 IC1.81 IC1.82 IC1.84 IC1.85 IC1.86 IC1.87 IC1.88 IC1.89 IC1.90 IC1.91 IC1.92 IC1.93 J1.4 J1.6 J1.8 J1.46 J1.48

## Polygon pours and split planes (outlines as drawn)
5V on Signal Layer 2 "5V Sig2" (solid, remove dead copper, pour order 2): -8.9,-12 8.9,-12 8.9,12 -8.9,12
GND on Signal Layer 1 "GND Sig1" (solid, remove dead copper, pour order 4): -8.9,-12 8.9,-12 8.9,12 -8.9,12
GND on Bottom Layer "GND BOT" (solid, remove dead copper, pour order 5): -8.9,-12 8.9,-12 8.9,12 -8.9,12
GND on Top Layer "GND TOP" (solid, remove dead copper, pour order 0): -8.9,-12 8.9,-12 8.9,12 -8.9,12

## Other copper
Top Layer:
  text "1" at 6.032,9.951 h0.9
Signal Layer 1:
  text "2" at 5.707,9.951 h0.9
Signal Layer 2:
  text "3" at 7.5,9.95 h0.9
Bottom Layer:
  text "4" at 8.95,9.95 h0.9
Multi-Layer:
  pour cut-out: 5.628,9.8 5.628,11.05 9.15,11.05 9.15,9.8

## Silkscreen, mask and mechanical layers (free items; w line width, h text height)
Top Overlay:
  lines w0.15: -5.418,7.437 -4.418,7.437 ; -5.417,8.563 -4.918,9.062 ; -4.918,7.437 -4.918,9.062 ; -4.418,8.563 -4.918,9.062
  text "SHVC-CPU-XX / SNSP-CPU-XX" at -3.75,-1.525 h0.8 r90
  text "SNES TST Adapter / Type A .Revision" at 6.675,-10.513 h0.9 r90
Mechanical 3:
  the board outline again, w0.05